# Altium PCB MINIRACER.PcbDoc
Units mil, origin at the board's own origin, x right, y up, seen from the top; angles counter-clockwise.
Board outline 5629.67 x 5957.44 mil, 4 copper layers (Top Layer, Mid-Layer 2, Mid-Layer 3, Bottom Layer); 108 components, 89 nets, 430 pads, 0 vias.
Unrouted connection lines stored in the file: 292.
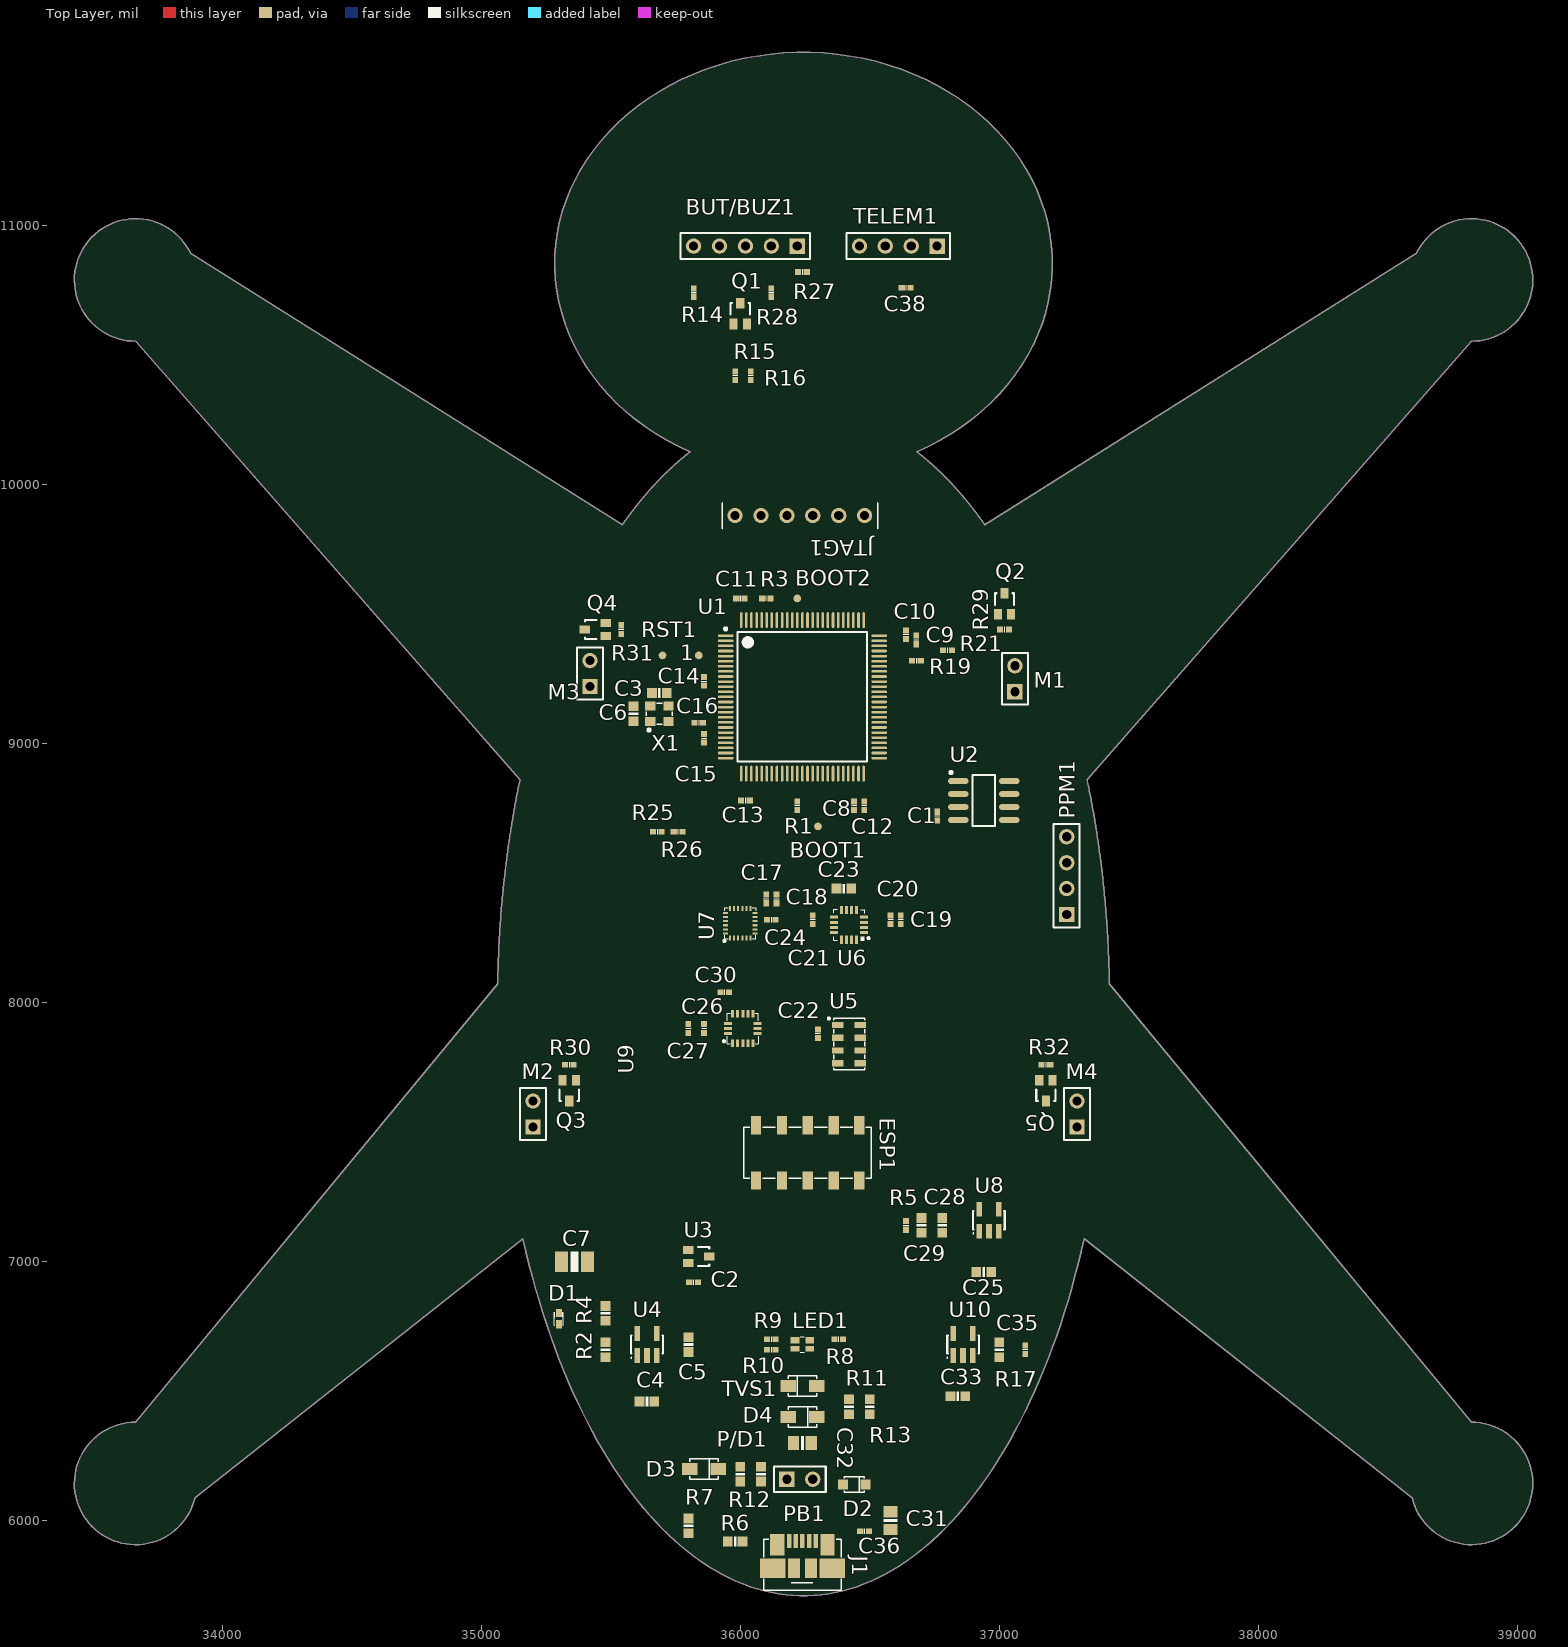
[diagram p0: Top Layer view]
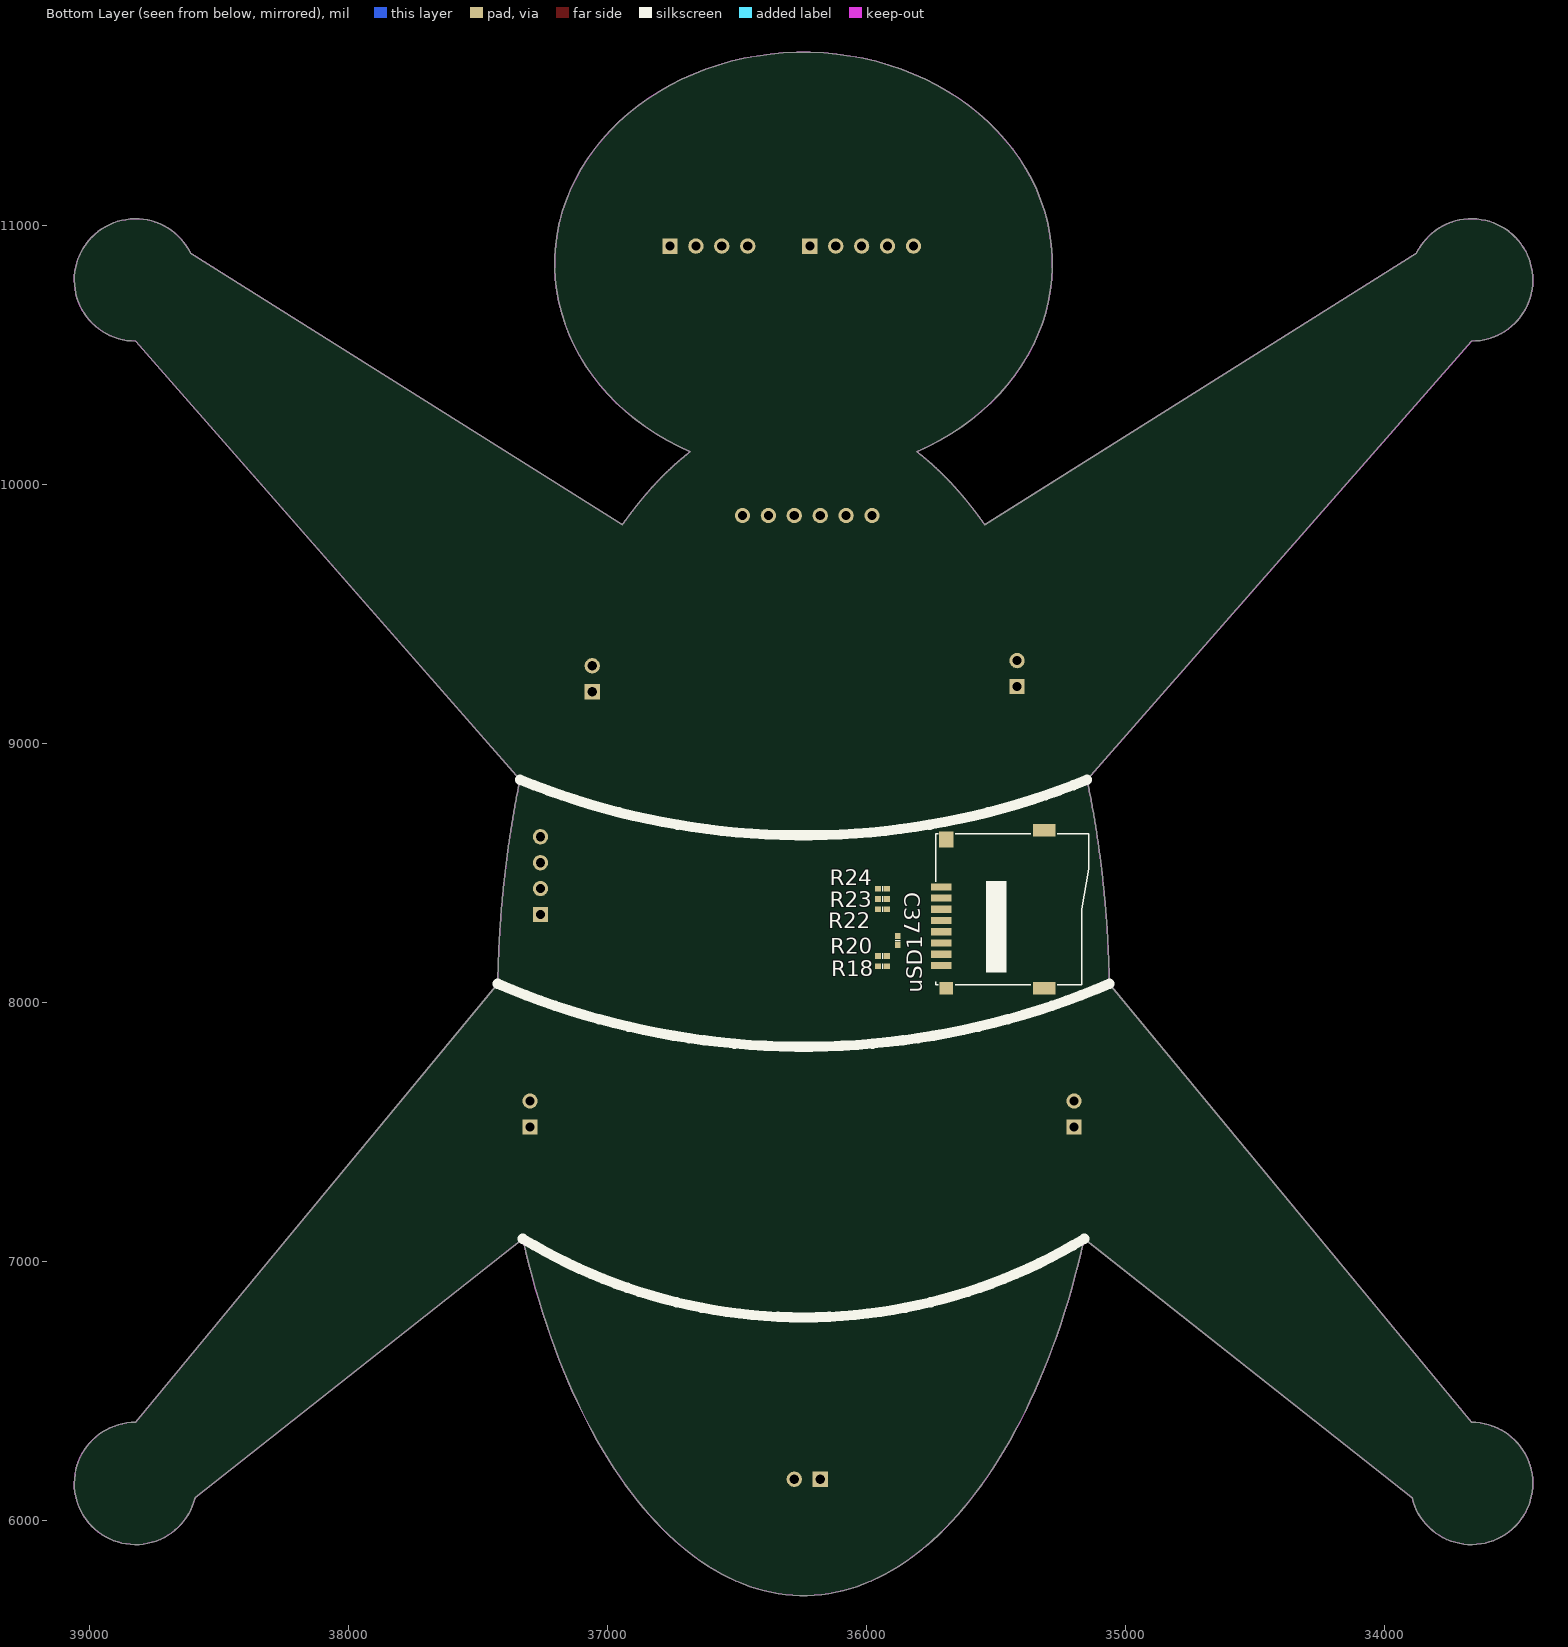
[diagram p1: Bottom Layer view, seen from below]

## Layer stack, top to bottom
Top Layer: signal copper 1.4
Dielectric: dielectric 12.6, FR-4, Dk 4.8
Mid-Layer 2: signal copper 1.4
Dielectric: dielectric 12.6, FR-4, Dk 4.8
Mid-Layer 3: signal copper 1.4
Dielectric: dielectric 12.6, FR-4, Dk 4.8
Bottom Layer: signal copper 1.4

## Board outline
617 vertices, not listed, extent 33429.49,5710.62 39059.15,11668.06

## Design rules (kind name [scope] priority, off if disabled: settings)
Clearance [All] p1: gap=10
PolygonConnect [All] p1: connectstyle=Relief reliefconductorwidth=10 reliefentries=4 polygonreliefangle="90 Angle"
RoutingLayers [All] p1: top layer_v5=TRUE mid layer 2_v5=FALSE mid layer 3_v5=FALSE bottom layer_v5=TRUE
RoutingVias [All] p1: holewidth=28 width=50 viastyle="Through Hole" minholewidth=28 minwidth=50 maxholewidth=28 maxwidth=50
SilkscreenOverComponentPads [All] p1: minsilkscreentomaskgap=10
SolderMaskExpansion [All] p1: expansion=4
TestPointUsage [All] p1: valid=0 allowmultiple=FALSE
Testpoint [All] p1: side=15 testpointundercomponent=TRUE minsize=40 maxsize=100 preferedsize=60 minholesize=0 maxholesize=40 preferedholesize=32 testpointgrid=1 style=1023 order=0123456789
Width "VCC or GND" [(InNet('VDD_5V_IN') OR InNet('VDD_5V_BRICK') OR InNet('VDD_5V_RECEIVER') OR InNet('VDD_3V3_SENSORS') OR InNet('VDD_3V3_PERIPH') OR InNet('VBUS') OR InNet('GND'))] p1: maxlimit=30 minlimit=30 preferedwidth=30
Width [All] p2: maxlimit=10 minlimit=10 preferedwidth=10
22 further rules are at their usual default settings.

## Classes and differential pairs
component class MINIRACER-SERIALS: BUT/BUZ1 C38 ESP1 M1 M2 M3 M4 PPM1 Q2 Q3 Q4 Q5 R27 R28 R29 R30 R31 R32 TELEM1
component class MINIRACER-SD-USB: C36 C37 J1 PB1 R18 R19 R20 R21 R22 R23 R24 R25 R26 uSD1
component class MINIRACER-POWER: C31 C32 C33 C35 D2 D3 D4 LED1 P/D1 Q1 R6 R7 R8 R9 R10 R11 R12 R13 R14 R15 R16 R17 TVS1 U10
component class MINIRACER-IMU: C17 C18 C19 C20 C21 C22 C23 C24 C25 C26 C27 C28 C29 C30 R5 U5 U6 U7 U8 U9
component class MINIRACER-FMU: 1 BOOT1 BOOT2 C1 C2 C3 C4 C5 C6 C7 C8 C9 C10 C11 C12 C13 C14 C15 C16 D1 JTAG1 R1 R2 R3 R4 RST1 U1 U2 U3 U4 X1

## Components (designator, comment, footprint, x,y, rotation, side; value= is the part's Value field where it differs from the comment)
1 "3V3" PAD1 35840,9340 r90 top
BOOT1 "BOOT1" PAD1 36300,8680 r90 top
BOOT2 "BOOT" PAD1 36220,9560 r90 top
BUT/BUZ1 "GH" HDR1X5 36220,10920 r180 top
C1 "100n" 0402A 36760,8720 r270 top
C2 "100n" 0402A 35820,6920 r0 top
C3 "8p" 0603A 35688,9195 r0 top
C4 "2u2" 0603A 35640,6460 r0 top
C5 "10u" 0603A 35800,6680 r90 top
C6 "8p" 0603A 35588,9115 r270 top
C7 "220uF 4V" 1206A 35360,7000 r180 top
C8 "2u2" 0402A 36439,8760 r90 top
C9 "2u2" 0402A 36680,9400 r270 top
C10 "100n" 0402A 36640,9420 r270 top
C11 "100n" 0402A 36000,9560 r0 top
C12 "100n" 0402A 36479,8760 r90 top
C13 "100n" 0402A 36020,8780 r180 top
C14 "100n" 0402A 35860,9240 r90 top
C15 "2u2" 0402A 35860,9020 r90 top
C16 "2u2" 0402A 35840,9080 r180 top
C17 "2u2" 0402A 36100,8400 r270 top
C18 "100n" 0402A 36140,8400 r270 top
C19 "2u2" 0402A 36620,8320 r90 top
C20 "100n" 0402A 36580,8320 r90 top
C21 "220n" 0402A 36280,8320 r270 top
C22 "100n" 0402A 36300,7880 r270 top
C23 "4u7" 0603A 36400,8440 r180 top
C24 "100n" 0402A 36120,8320 r0 top
C25 "2u2" 0603A 36940,6960 r180 top
C26 "2u2" 0402A 35860,7900 r90 top
C27 "100n" 0402A 35800,7900 r90 top
C28 "100n" 0603A 36780,7140 r90 top
C29 "10u" 0603A 36700,7140 r90 top
C30 "0u47" 0402A 35940,8040 r0 top
C31 "100uF 10V" 0805A 36580,6000 r270 top
C32 "100uF 10V" 0805A 36240,6300 r0 top
C33 "2u2" 0603A 36840,6480 r180 top
C35 "10u" 0603A 37000,6660 r90 top
C36 "100n" 0402A 36480,5960 r0 top
C37 "100n" 0402A 35880,8240 r90 bottom
C38 "2u2" 0402A 36640,10760 r0 top
D1 "BAS70-02V" SOD-523 35300,6780 r270 top
D2 "PMEG1030" sod323f 36440,6140 r0 top
D3 "5.6V" SOD123F 35860,6200 r0 top
D4 "5.6V" SOD123F 36240,6400 r0 top
ESP1 "2x5 0.1\"" 2.54mm_10pin_SMD 36260,7420 r0 top
J1 "miniUSB" USBmicro_B 36240,5760 r0 top
JTAG1 "JST SM06B" HDR1X6 36480,9880 r180 top
LED1 "LTST-C19HE1WT" LTST-C19HE1WT 36240,6680 r90 top
M1 "" HDR1X2 37060,9200 r90 top
M2 "" HDR1X2 35200,7520 r90 top
M3 "" HDR1X2 35420,9220 r90 top
M4 "" HDR1X2 37300,7520 r90 top
P/D1 "POWER LED GREEN" 0603A 36000,6180 r90 top
PB1 "POWERBRICK JST GH" HDR1X2 36180,6160 r0 top
PPM1 "GH" HDR1X4 37260,8340 r90 top
Q1 "DMG1012UW" 2N7002-SOT323 36000,10700 r0 top
Q2 "DMG1012UW" 2N7002-SOT323 37020,9580 r0 top
Q3 "DMG1012UW" 2N7002-SOT323 35340,7620 r180 top
Q4 "DMG1012UW" 2N7002-SOT323 35400,9440 r90 top
Q5 "DMG1012UW" 2N7002-SOT323 37180,7620 r180 top
R1 "10k" 0402A 36220,8760 r270 top
R2 "220R" 0603A 35480,6660 r90 top
R3 "10k" 0402A 36100,9560 r0 top
R4 "1k" 0603A 35480,6800 r90 top
R5 "220R" 0402A 36640,7140 r270 top
R6 "10K" 0603A 35980,5920 r0 top
R7 "470R" 0603A 35800,5980 r90 top
R8 "100R" 0402A 36380,6700 r0 top
R9 "100R" 0402A 36120,6700 r180 top
R10 "100R" 0402A 36120,6660 r180 top
R11 "220R" 0603A 36420,6440 r90 top
R12 "220R" 0603A 36080,6180 r90 top
R13 "220R" 0603A 36500,6440 r270 top
R14 "0R0" 0402A 35820,10740 r90 top
R15 "10k" 0402A 35980,10420 r90 top
R16 "10k" 0402A 36040,10420 r90 top
R17 "220R" 0402A 37100,6660 r270 top
R18 "100k" 0402A 35940,8140 r180 bottom
R19 "22R" 0402A 36680,9320 r0 top
R20 "100k" 0402A 35940,8180 r180 bottom
R21 "22R" 0402A 36800,9360 r0 top
R22 "100k" 0402A 35940,8360 r180 bottom
R23 "100k" 0402A 35940,8400 r180 bottom
R24 "100k" 0402A 35940,8440 r180 bottom
R25 "10k" 0402A 35680,8660 r0 top
R26 "10k" 0402A 35760,8660 r180 top
R27 "1K5" 0402A 36240,10820 r180 top
R28 "68R" 0402A 36120,10740 r90 top
R29 "33k" 0402A 37020,9440 r180 top
R30 "33k" 0402A 35340,7760 r0 top
R31 "33k" 0402A 35540,9440 r270 top
R32 "33k" 0402A 37180,7760 r0 top
RST1 "BOOT" PAD1 35700,9340 r90 top
TELEM1 "GH" HDR1X4 36760,10920 r180 top
TVS1 "5.6V" SOD123F 36240,6520 r180 top
U1 "STM32F427VIT6" LQFP100_L 36240,9180 r0 top
U2 "FM25V02-G" SO-8_N 36940,8780 r0 top
U3 "MCP131" SOT-323 35840,7020 r270 top
U4 "LP5907-Q1" SOT23-5 35640,6680 r0 top
U5 "MS5611" MS5611 36420,7840 r0 top
U6 "HMC5983" HMC5883L 36420,8300 r180 top
U7 "MPU9250/6500" MPU6500-9250 36000,8306.32 r90 top
U8 "LP5907-Q1" SOT23-5 36960,7160 r0 top
U9 "ICM-20608-G" HCLGA-16L 36009.78,7900 r90 top
U10 "LP5907-Q1" SOT23-5 36860,6680 r0 top
uSD1 "MicroSD" MicroSD_China_01 35300,8360 r90 bottom
X1 "24MHz" Crystal_2.5x2 35688,9115 r0 top

## Footprints (in the part's own frame and the unit in brackets; to place one, negate y for a bottom-side part, rotate by r counter-clockwise, add the part's x,y. Pads: shape width x height; smd on the part's side, far side on the other; paste and mask are expansions set on the pad)
2.54mm_10pin_SMD [mm]
  rect 1x1.78 smd: 1(-5.06,-2.7) 2(-5.06,2.7) 3(-2.52,-2.7) 4(-2.52,2.7) 5(0.02,-2.7) 6(0.02,2.7) 7(2.56,-2.7) 8(2.56,2.7) 9(5.06,-2.7) 10(5.06,2.7)
  silkscreen extent -6.24,-2.5 6.26,2.5
2N7002-SOT323 [mm]
  rect 0.8x1.05 smd: 1(0,0) 2(0.65,-2.05) 3(-0.65,-2.05)
  silkscreen extent -0.95,-1.13 0.95,0
0402A [mm]
  rect 0.6x0.55 smd: 1(0.425,0) 2(-0.425,0)
  silkscreen extent -0.05,-0.27 0.05,0.28
0603A [mm]
  rect 0.95x0.95 smd: 1(-0.725,0) 2(0.725,0)
  silkscreen extent -0.13,-0.47 0.13,0.48
0805A [mm]
  rect 1.1x1.4 smd: 1(0.875,0) 2(-0.875,0)
  silkscreen extent -0.15,-0.7 0.15,0.7
1206A [mil]
  rect 50x80 smd: 1(-50,0) 2(50,0)
  silkscreen extent -15,-40 15,40
Crystal_2.5x2 [mil]
  rect 40x35 smd: 1(-35,-30) 2(35,-30) 3(35,30) 4(-35,30)
  silkscreen extent -50,-68 50,40
HCLGA-16L [mm]
  rect 0.75x0.3 smd: 1(-1.45,1) 2(-1.45,0.5) 3(-1.45,0) 4(-1.45,-0.5) 5(-1.45,-1) 9(1.45,-1) 10(1.45,-0.5) 11(1.45,0) 12(1.45,0.5) 13(1.45,1)
  rect 0.3x0.75 smd: 6(-0.5,-1.45) 7(0,-1.45) 8(0.5,-1.45) 14(0.5,1.45) 15(0,1.45) 16(-0.5,1.45)
  silkscreen extent -1.5,-1.5 1.5,1.95
HDR1X2 [mm] "Connector; Header; 2 Position"
  rect 1.5x1.5 hole 0.9: 1(0,0)
  round 1.5 hole 0.9: 2(2.54,0)
  silkscreen extent -1.27,-1.27 3.81,1.27
HDR1X4 [mm] "Connector; Header; 4 Position"
  rect 1.5x1.5 hole 0.9: 1(0,0)
  round 1.5 hole 0.9: 2(2.54,0) 3(5.08,0) 4(7.62,0)
  silkscreen extent -1.27,-1.27 8.89,1.27
HDR1X5 [mm] "Connector; Header; 5 Position"
  rect 1.5x1.5 hole 0.9: 1(0,0)
  round 1.5 hole 0.9: 2(2.54,0) 3(5.08,0) 4(7.62,0) 5(10.16,0)
  silkscreen extent -1.27,-1.27 11.43,1.27
HDR1X6 [mm] "Connector; Header; 6 Position"
  round 1.5 / inner round 1.2 / far side round 1.5 hole 0.9: 1(0,0) 2(2.54,0) 3(5.08,0) 4(7.62,0) 5(10.16,0) 6(12.7,0)
  silkscreen extent -1.27,-1.27 13.97,1.27
HMC5883L [mil]
  rect 31.5x11.81 smd: 1(-57.5,29.52) 2(-57.5,9.84) 3(-57.5,-9.84) 4(-57.5,-29.52) 9(57.5,-29.52) 10(57.5,-9.84) 11(57.5,9.84) 12(57.5,29.52)
  rect 11.81x31.5 smd: 5(-29.53,-57.5) 6(-9.84,-57.5) 7(9.84,-57.5) 8(29.53,-57.5) 13(29.53,57.5) 14(9.84,57.5) 15(-9.84,57.5) 16(-29.53,57.5)
  silkscreen extent -79,-60 60,59
LQFP100_L [mm] "Thin QFP, 100-Leads, Body 14x14mm, Pitch 0.5mm, IPC High Density"
  oval 1.55x0.25 smd: 1(-7.525,6) 2(-7.525,5.5) 3(-7.525,5) 4(-7.525,4.5) 5(-7.525,4) 6(-7.525,3.5) 7(-7.525,3) 8(-7.525,2.5) 9(-7.525,2) 10(-7.525,1.5) 11(-7.525,1) 12(-7.525,0.5) 13(-7.525,0) 14(-7.525,-0.5) 15(-7.525,-1) 16(-7.525,-1.5) 17(-7.525,-2) 18(-7.525,-2.5) 19(-7.525,-3) 20(-7.525,-3.5) 21(-7.525,-4) 22(-7.525,-4.5) 23(-7.525,-5) 24(-7.525,-5.5) 25(-7.525,-6) 51(7.525,-6) 52(7.525,-5.5) 53(7.525,-5) 54(7.525,-4.5) 55(7.525,-4) 56(7.525,-3.5) 57(7.525,-3) 58(7.525,-2.5) 59(7.525,-2) 60(7.525,-1.5) 61(7.525,-1) 62(7.525,-0.5) 63(7.525,0) 64(7.525,0.5) 65(7.525,1) 66(7.525,1.5) 67(7.525,2) 68(7.525,2.5) 69(7.525,3) 70(7.525,3.5) 71(7.525,4) 72(7.525,4.5) 73(7.525,5) 74(7.525,5.5) 75(7.525,6)
  oval 0.25x1.55 smd: 26(-6,-7.525) 27(-5.5,-7.525) 28(-5,-7.525) 29(-4.5,-7.525) 30(-4,-7.525) 31(-3.5,-7.525) 32(-3,-7.525) 33(-2.5,-7.525) 34(-2,-7.525) 35(-1.5,-7.525) 36(-1,-7.525) 37(-0.5,-7.525) 38(0,-7.525) 39(0.5,-7.525) 40(1,-7.525) 41(1.5,-7.525) 42(2,-7.525) 43(2.5,-7.525) 44(3,-7.525) 45(3.5,-7.525) 46(4,-7.525) 47(4.5,-7.525) 48(5,-7.525) 49(5.5,-7.525) 50(6,-7.525) 76(6,7.525) 77(5.5,7.525) 78(5,7.525) 79(4.5,7.525) 80(4,7.525) 81(3.5,7.525) 82(3,7.525) 83(2.5,7.525) 84(2,7.525) 85(1.5,7.525) 86(1,7.525) 87(0.5,7.525) 88(0,7.525) 89(-0.5,7.525) 90(-1,7.525) 91(-1.5,7.525) 92(-2,7.525) 93(-2.5,7.525) 94(-3,7.525) 95(-3.5,7.525) 96(-4,7.525) 97(-4.5,7.525) 98(-5,7.525) 99(-5.5,7.525) 100(-6,7.525)
  silkscreen extent -7.65,-6.35 6.35,6.8, body extent -7,-7 7,7, height 1.6
LTST-C19HE1WT [mm]
  rect 0.55x0.85 smd: 1(-0.425,0.725) 4(-0.425,-0.725)
  rect 0.65x0.85 smd: 2(0.425,0.725) 3(0.425,-0.725)
  silkscreen extent -0.75,-0.2 0.75,0.2
MicroSD_China_01 [mm]
  rect 0.7x2 smd: 1(2.2,10.5) 2(1.1,10.5) 3(0,10.5) 4(-1.1,10.5) 5(-2.2,10.5) 6(-3.3,10.5) 7(-4.4,10.5) 8(-5.5,10.5)
  rect 0x0 smd: 9(-6.6,10.5)
  rect 1.2x2.2 smd: GND(-7.75,0.4) GND(7.75,0.4)
  rect 1.2x1.3 smd: GND(-7.75,10)
  rect 1.6x1.4 smd: GND(6.85,10)
  silkscreen extent -7.4,-4 7.4,11
MPU6500-9250 [mm]
  rect 0.5x0.2 smd: 1(-1.45,1) 2(-1.45,0.6) 3(-1.45,0.2) 4(-1.45,-0.2) 5(-1.45,-0.6) 6(-1.45,-1) 13(1.45,-1) 14(1.45,-0.6) 15(1.45,-0.2) 16(1.45,0.2) 17(1.45,0.6) 18(1.45,1)
  rect 0.2x0.5 smd: 7(-1,-1.45) 8(-0.6,-1.45) 9(-0.2,-1.45) 10(0.2,-1.45) 11(0.6,-1.45) 12(1,-1.45) 19(1,1.45) 20(0.6,1.45) 21(0.2,1.45) 22(-0.2,1.45) 23(-0.6,1.45) 24(-1,1.45)
  silkscreen extent -1.85,-1.5 1.5,1.66
MS5611 [mil]
  rect 44x24 smd: 1(-43.3,73.8) 2(-43.3,24.6) 3(-43.3,-24.6) 4(-43.3,-73.8) 5(43.3,-73.8) 6(43.3,-24.6) 7(43.3,24.6) 8(43.3,73.8)
  silkscreen extent -81,-100 60,101
PAD1 [mm]
  round 0.75 smd: 1(0,0)
SO-8_N [mm] "8-Pin Small Outline Integrated Circuit 1.27 mm Pitch, IPC Medium Density"
  oval 2x0.6 smd: 1(-2.5,1.905) 2(-2.5,0.635) 3(-2.5,-0.635) 4(-2.5,-1.905) 5(2.5,-1.905) 6(2.5,-0.635) 7(2.5,0.635) 8(2.5,1.905)
  silkscreen extent -3.35,-2.5 1.1,2.87, body extent -2,-2.5 2,2.5, height 1.75
SOD123F [mm]
  rect 1.5x1.2 smd: 1(-1.4,0) 2(1.4,0)
  silkscreen extent -1.4,-1 1.4,1
sod323f [mm]
  rect 1x1 smd: 1(-1.1,0) 2(1.1,0)
  silkscreen extent -1,-0.75 1,0.75
SOD-523 [mm]
  rect 0.8x0.6 smd: 1(0.55,0) 2(-0.55,0)
  silkscreen extent -0.65,-0.45 0.65,0.45
SOT23-5 [mm] "SOT-23/SC-74A; 5 Leads; Body 3 x 3 mm, inc. leads (LxW max)"
  rect 0.55x1.45 smd: 1(-0.95,-1.075) 2(0,-1.075) 3(0.95,-1.075) 4(0.95,1.075) 5(-0.95,1.075)
  silkscreen extent -1.57,-1.35 1.55,0.9
SOT-323 [mm] "SOT-323/SC-70; 3 Leads; Body 2.2 x 2.2 mm, inc. leads (LxW max)"
  rect 0.8x1.05 smd: 1(-0.65,-1.025) 2(0.65,-1.025) 3(0,1.025)
  silkscreen extent -0.95,-0.1 0.95,1.03
USBmicro_B [mm]
  rect 0.45x1.4 smd: 1(-1.3,4.1) 2(-0.65,4.1) 3(0,4.1) 4(0.65,4.1) 5(1.3,4.1)
  rect 1.4x2.1 smd: 6(-2.462,3.75) 6(2.462,3.75)
  rect 1.175x1.9 smd: 6(-0.835,1.45) 6(0.835,1.45)
  rect 2.5x1.9 smd: 7(-2.9,1.45) 7(2.9,1.45)
  silkscreen extent -3.8,-0.7 3.8,4.3

## Part data
1 BOOT1 BOOT2 RST1: library part PLUG
BUT/BUZ1: library part "Header 5", "Header, 5-Pin"
C1 C2 C3 C4 C5 C6 C7 C8 C9 C10 C11 C12 C13 C14 C15 C16 C17 C18 C19 C20 C21 C22 C23 C24 C25 C26 C27 C28 C29 C30 C31 C32 C33 C35 C36 C37 C38: library part Cap, "Capacitor"
D1 D2: library part "D Schottky", "Schottky Diode"
D3 D4 TVS1: library part "D Zener", "Zener Diode"
ESP1: library part "Header 10", "Header, 10-Pin"
J1: library part MicroUSB
JTAG1: library part "Header 6", "Header, 6-Pin"
LED1: library part RGB_LED_5MM
M1 M2 M3 M4 PB1: library part "Header 2", "Header, 2-Pin"
P/D1: library part LED0, "Typical INFRARED GaAs LED"
PPM1 TELEM1: library part "Header 4", "Header, 4-Pin"
Q1 Q2 Q3 Q4 Q5: library part NMOS-2, "N-Channel Power MOSFET"
R1 R2 R3 R4 R5 R6 R7 R8 R9 R10 R11 R12 R13 R14 R15 R16 R17 R18 R19 R20 R21 R22 R23 R24 R25 R26 R27 R28 R29 R30 R31 R32: library part Res2, "Resistor"
U1: library part STM32F103VBT6, "STM32 ARM-based 32-bit MCU with 64 Kbytes Flash, 100-pin LQFP, Industrial Temperature"
U2: library part AT45DB161D-MU
U3: library part MCP102
U5: library part MS5611-01BA03
U7: library part MPU6500
X1: library part Crystal_4pin

## Nets (pads, with @x,y where several pads share a name; then routed paths per layer and width w, separated by ;. In a path a pad name is that pad's centre, name@x,y a point inside that pad or via, vN(x,y) a via of type N, cw(c..) or ccw(c..) an arc to the next point about the centre after c; other vN are vias at no path point)
8266_CTS: ESP1.10 U1.41
8266_GPIO0: ESP1.6 U1.1
8266_GPIO2: ESP1.4 U1.90
8266_PD: ESP1.3 U1.4
8266_RST: ESP1.5 U1.5
8266_RTS: ESP1.9 U1.67
20608_CS: U1.9 U9.5
20608_DRDY: U1.8 U9.6
\R\S\T\: RST1.1 U1.14 U3.1
ALARM: R15.2 U1.77
BARO_CS: U1.88 U5.5
BUZZER+: BUT/BUZ1.5 R14.1
BUZZER-: BUT/BUZ1.4 Q1.1
FMU_CH1: Q2.3 R29.1 U1.45
FMU_CH2: Q3.3 R30.1 U1.44
FMU_CH3: Q4.3 R31.1 U1.42
FMU_CH4: Q5.3 R32.1 U1.40
FMU_LED_BLUE: R8.1 U1.89
FMU_LED_GREEN: R9.1 U1.36
FMU_LED_RED: R10.1 U1.48
FMU_RC_INPUT: PPM1.4 U1.35 U1.64
FMU_SWCLK: JTAG1.5 U1.76
FMU_SWDIO: JTAG1.4 U1.72
FMU_UART7_RX: JTAG1.2 U1.38
FMU_UART7_TX: JTAG1.1 U1.39
FMU_USART1_RX: ESP1.1 U1.93
FMU_USART1_TX: ESP1.8 U1.92
FMU_USART2_RX: TELEM1.3 U1.87
FMU_USART2_TX: TELEM1.2 U1.86
FMU_VBAT: C7.2 D1.2 U1.6
FMU_VDD_3V3: 1.1 BUT/BUZ1.3 C1.2 C2.2 C5.2 C10.2 C11.2 C12.2 C13.2 C14.2 C15.2 C16.2 C37.1 JTAG1.3 LED1.4 R2.2 R4.1 R18.2 R20.2 R22.2 R23.2 R24.2 U1.11 U1.19 U1.21 U1.22 U1.28 U1.50 U1.75 U1.100 U2.3 U2.7 U2.8 U3.2 U4.5 uSD1.4
FRAM_CS: U1.57 U2.1
FRAM_MISO: U1.53 U2.2 U5.6
FRAM_MOSI: U1.54 U2.5 U5.7
FRAM_SCK: U1.47 U2.6 U5.8
GND: C1.1 C2.1 C3.1 C4.1 C5.1 C6.1 C7.1 C8.2 C9.2 C10.1 C11.1 C12.1 C13.1 C14.1 C15.1 C16.1 C17.1 C18.1 C19.1 C20.1 C22.1 C23.1 C24.1 C25.1 C26.1 C27.1 C28.1 C29.1 C30.1 C31.1 C32.1 C33.1 C35.1 C36.1 C37.2 C38.2 ESP1.2 J1.5 J1.6 J1.7 JTAG1.6 PB1.2 PPM1.1 Q1.2 Q2.2 Q3.2 Q4.2 Q5.2 R1.1 R2.1 R3.2 R5.1 R7.1 R12.1 R13.2 R16.2 R17.1 R26.2 R27.2 R29.2 R30.2 R31.2 R32.2 TELEM1.4 TVS1.1 U1.10 U1.20 U1.27 U1.74 U1.99 U2.4 U3.3 U4.2 U5.2 U5.3 U6.6 U6.9 U6.11 U7.11 U7.18 U7.20 U8.2 U9.7 U9.8 U9.9 U9.10 U9.11 U9.12 U9.13 U9.15 U10.2 uSD1.6 X1.2 X1.4
HMC5983_CS: U1.46 U6.4
HMC5983_DRDY: U1.43 U6.15
LED_SAFETY: R28.2 U1.18
MPU9250_CS: U1.17 U7.22
MPU9250_DRDY: U1.62 U7.12
MPU9250_MISO: U1.31 U6.5 U7.9 U9.4
MPU9250_MOSI: U1.32 U6.16 U7.24 U9.3
MPU9250_SCK: U1.30 U6.1 U7.23 U9.2
NetBOOT1_1: BOOT1.1 R1.2 U1.37
NetBOOT2_1: BOOT2.1 R3.1 U1.94
NetBUT/BUZ1_2: BUT/BUZ1.2 R28.1
NetC8_1: C8.1 U1.49
NetC9_1: C9.1 U1.73
NetC21_1: C21.1 U6.12
NetC21_2: C21.2 U6.8
NetC23_2: C23.2 U6.10
NetC24_2: C24.2 U7.10
NetC30_2: C30.2 U9.14
NetD1_1: D1.1 R4.2
NetJ1_2: J1.2 R19.1
NetJ1_3: J1.3 R21.1
NetLED1_1: LED1.1 R10.2
NetLED1_2: LED1.2 R9.2
NetLED1_3: LED1.3 R8.2
NetM1_2: M1.2 Q2.1
NetM2_2: M2.2 Q3.1
NetM3_2: M3.2 Q4.1
NetM4_2: M4.2 Q5.1
NetP/D1_2: P/D1.2 R12.2
NetQ1_3: Q1.3 R15.1 R16.1
OSC_IN: C3.2 U1.12 X1.3
OSC_OUT: C6.2 U1.13 X1.1
OTG_FS_DM: R19.2 U1.70
OTG_FS_DP: R21.2 U1.71
RSSI_IN: PPM1.3 U1.16
SAFETY_SWITCH_IN: BUT/BUZ1.1 R27.1 U1.33
SDIO_CK: U1.80 uSD1.5
SDIO_CMD: R22.1 U1.83 uSD1.3
SDIO_D0: R20.1 U1.65 uSD1.7
SDIO_D1: R18.1 U1.66 uSD1.8
SDIO_D2: R24.1 U1.78 uSD1.1
SDIO_D3: R23.1 U1.79 uSD1.2
VBUS: C36.2 D3.1 J1.1 R6.2 R7.2 U1.68
VBUS_VALID: R6.1 U1.15
VDD_3V3_PERIPH: C35.2 ESP1.7 R17.2 U10.5
VDD_3V3_PERIPH_EN: U1.34 U10.3
VDD_3V3_SENSORS: C17.2 C18.2 C19.2 C20.2 C22.2 C26.2 C27.2 C28.2 C29.2 R5.2 U5.1 U6.2 U6.13 U7.1 U7.8 U7.13 U8.5 U9.1 U9.16
VDD_3V3_SENSORS_EN: U1.2 U8.3
VDD_5V_BRICK: C32.2 D4.1 PB1.1
VDD_5V_IN: C4.2 C25.2 C31.2 C33.2 C38.1 D2.1 D3.2 D4.2 M1.1 M2.1 M3.1 M4.1 P/D1.1 R11.1 R14.2 R25.2 TELEM1.1 TVS1.2 U4.1 U4.3 U8.1 U10.1
VDD_5V_RECEIVER: D2.2 PPM1.2
VDD_5V_SENS: R25.1 R26.1 U1.29
VDD_BRICK_VALID: R11.2 R13.1 U1.91
pads on no net: J1.4 U1.3 U1.7 U1.23 U1.24 U1.25 U1.26 U1.51 U1.52 U1.55 U1.56 U1.58 U1.59 U1.60 U1.61 U1.63 U1.69 U1.81 U1.82 U1.84 U1.85 U1.95 U1.96 U1.97 U1.98 U4.4 U5.4 U6.3 U6.7 U6.14 U7.2 U7.3 U7.4 U7.5 U7.6 U7.7 U7.14 U7.15 U7.16 U7.17 U7.19 U7.21 U8.4 U10.4 uSD1.9 uSD1.GND

## Keep-outs
Keep-Out Layer:
  the board outline again, w3.94

## Silkscreen, mask and mechanical layers (free items; w line width, h text height)
Bottom Overlay:
  lines w39.37: 35063.84,8072.87 ccw(c36244.32,10815.23) 37424.8,8072.87 ; 35149.82,8860.28 ccw(c36244.32,11541.07) 37338.82,8860.28 ; 35160.8,7088.63 ccw(c36244.32,8867.08) 37327.85,7088.63
Drill Drawing:
  drawing of 412 lines, arcs and shapes, not listed